# Altium PCB nrf52module.PcbDoc
Units mm, origin at the board's own origin, x right, y up, seen from the top; angles counter-clockwise.
Board outline 61 x 21 mm, 2 copper layers (Top Layer, Bottom Layer); 27 components, 54 nets, 114 pads, 16 vias.
Unrouted connection lines stored in the file: 43.
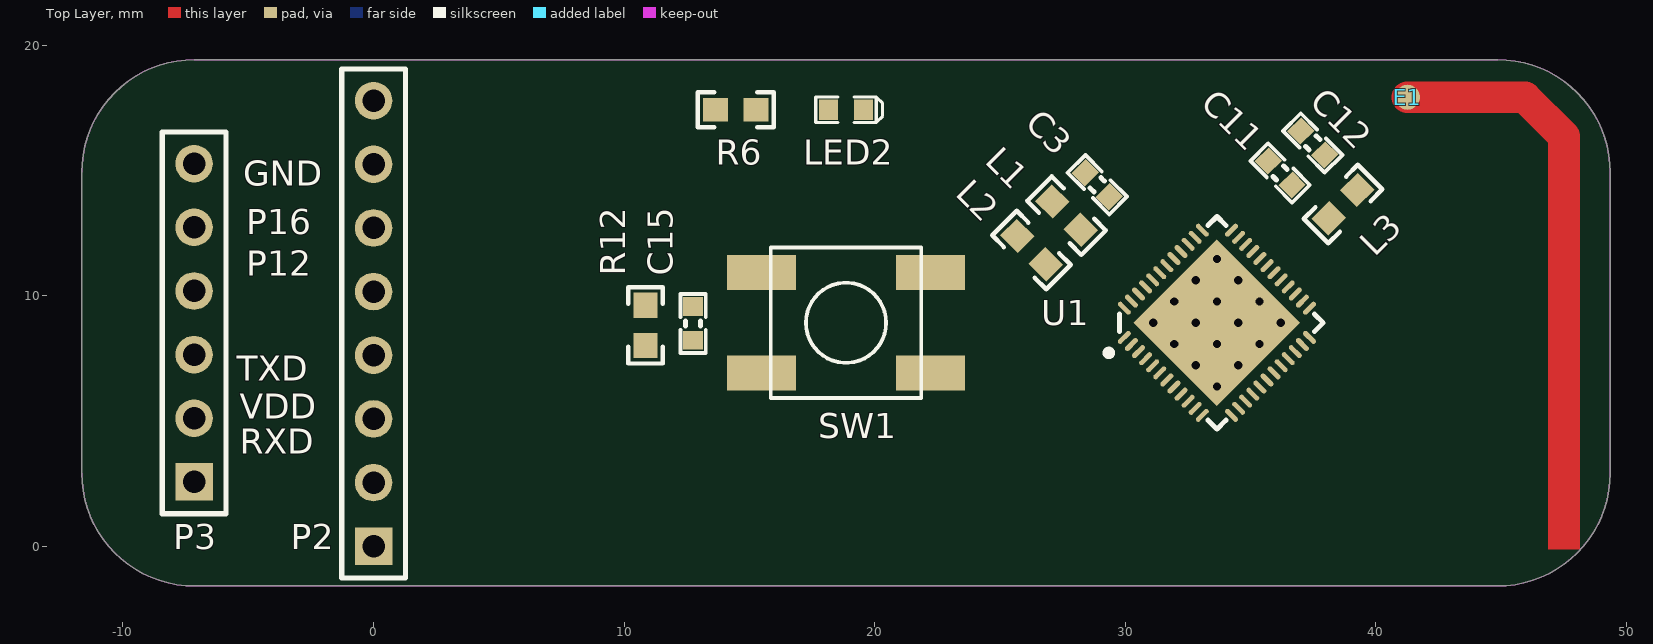
[diagram p0: Top Layer view]
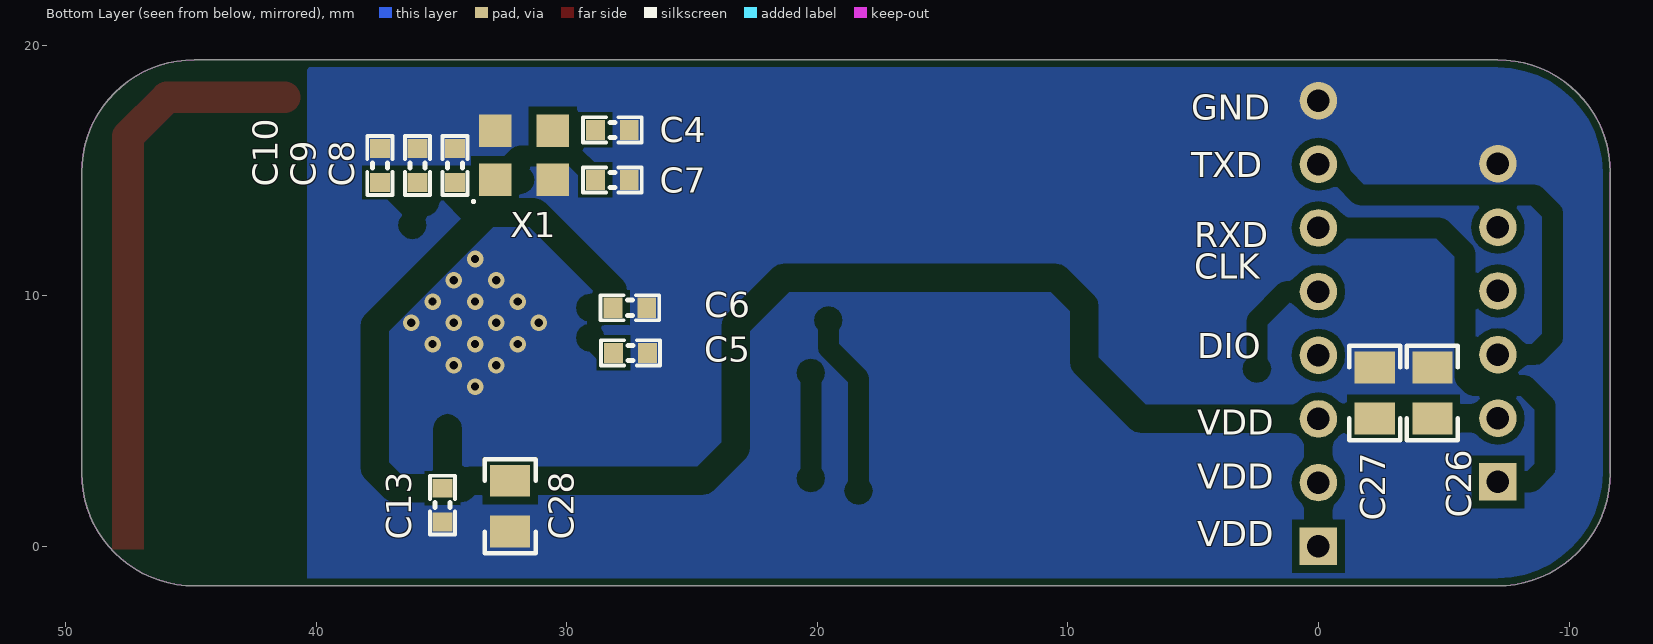
[diagram p1: Bottom Layer view, seen from below]

## Layer stack, top to bottom
Top Solder: solder mask 0.0102, Solder Resist, Dk 3.5
Top Layer: signal copper 0.0356
Dielectric 1: dielectric 0.32, FR-4, Dk 4.8
Bottom Layer: signal copper 0.0356
Bottom Solder: solder mask 0.0102, Solder Resist, Dk 3.5

## Board outline
-11.648,2.915 ccw(c-7.148,2.915) -7.148,-1.585 44.852,-1.585 ccw(c44.852,2.915) 49.352,2.915 49.352,14.915 ccw(c44.852,14.915) 44.852,19.415 -7.148,19.415 ccw(c-7.148,14.915) -11.648,14.915

## Design rules (kind name [scope] priority, off if disabled: settings)
Clearance [All] p1: gap=0.3
PolygonConnect [All] p1: connectstyle=Direct reliefconductorwidth=0.254 reliefentries=4 polygonreliefangle="90 Angle" airgapwidth=0.254
RoutingVias [All] p1: holewidth=0.711 width=1.27 viastyle="Through Hole" minholewidth=0.3 minwidth=0.3 maxholewidth=0.711 maxwidth=1.27
SolderMaskExpansion [All] p1: expansion=0.102
Width [All] p1: maxlimit=5 minlimit=0.2 preferedwidth=0.254
30 further rules are at their usual default settings.

## Classes and differential pairs
component class pca10040_sheet3_buttons_and_leds: C14 C15 C19 C20 C26 C27 C28 LED2 P3 R6 R9 R12 SB1 SW1 SW5

## Components (designator, comment, footprint, x,y, rotation, side; value= is the part's Value field where it differs from the comment)
C3 "1.0µF" CAPC1608X06L 28.88,14.427 r315 top
C4 "12pF" CAPC1608X06L 28.177,16.615 r180 bottom
C5 "100nF" CAPC1608X06L 27.452,7.715 r180 bottom
C6 "4.7µF" CAPC1608X06L 27.477,9.515 r180 bottom
C7 "12pF" CAPC1608X06L 28.177,14.615 r180 bottom
C8 "100nF" CAPC1608X06L 34.452,15.19 r90 bottom
C9 "100pF" CAPC1608X06L 35.952,15.19 r90 bottom
C10 "N.C." CAPC1608X06L 37.452,15.19 r90 bottom
C11 "0.8pF" CAPC1608X06L 36.175,14.893 r315 top
C12 "1.2pF" CAPC1608X06L 37.475,16.093 r135 top
C13 "100nF" CAPC1608X06L 34.952,1.64 r270 bottom
C15 "1.0µF" CAPC1608X06L 12.752,8.89 r90 top
C26 "105" 0805_HV -4.548,6.115 r270 bottom
C27 "105" 0805_HV -2.248,6.115 r270 bottom
C28 "105" 0805_HV 32.252,1.599 r90 bottom
E1 "Antenna" nrfant 41.252,17.915 r270 top locked
L1 "15nH" 0603 27.654,13.189 r135 top
L2 "10µH" 0603 26.252,11.815 r315 top
L3 "3.9nH" 0603 38.687,13.65 r45 top
LED2 "L0603G" LED_0603_G 18.852,17.415 r180 top locked
P2 "Header 8" HDR1X8 0,0 r90 top
P3 "Header 6" HDR1X6 -7.163,2.565 r90 top locked
R6 "220R" 0603 14.452,17.415 r180 top
R12 "100k" 0603 10.852,8.815 r90 top
SW1 "PB SW" Switch-PB-6.2x6.3mm-SMD 18.852,8.916 r0 top locked
U1 "nRF52832-QFAA" QFN40P600X600X90-48N 33.652,8.915 r45 top locked
X1 "CX3225SB32000D0FFFCC" SON230P260X60-4N 31.702,15.6 r90 bottom

## Footprints (in the part's own frame and the unit in brackets; to place one, negate y for a bottom-side part, rotate by r counter-clockwise, add the part's x,y. Pads: shape width x height; smd on the part's side, far side on the other; paste and mask are expansions set on the pad)
0603 [mm] "0603 from SM-752 data"
  rect 1x0.95 smd: 1(-0.8,0) 2(0.8,0)
  silkscreen extent -1.52,-0.69 1.52,0.69, body extent -0.87,-0.47 0.87,0.47, height 1
0805_HV [mil] "0805 with 30mil clearance between pads"
  rect 50x63 smd: 1(-40,0) 2(40,0)
  silkscreen extent -74,-40 74,40, body extent -43,-29 43,29, height 57
CAPC1608X06L [mm]
  rect 0.75x0.8 smd: 1(-0.675,0) 2(0.675,0)
  silkscreen extent -1.18,-0.5 1.18,0.5, body extent -0.8,-0.43 0.8,0.43, height 0.8
HDR1X6 [mm] "Connector; Header; 6 Position"
  rect 1.5x1.5 hole 0.9: 1(0,0)
  round 1.5 hole 0.9: 2(2.54,0) 3(5.08,0) 4(7.62,0) 5(10.16,0) 6(12.7,0)
  silkscreen extent -1.27,-1.27 13.97,1.27
HDR1X8 [mm] "Connector; Header; 8 Position"
  rect 1.5x1.5 hole 0.9: 1(0,0)
  round 1.5 hole 0.9: 2(2.54,0) 3(5.08,0) 4(7.62,0) 5(10.16,0) 6(12.7,0) 7(15.24,0) 8(17.78,0)
  silkscreen extent -1.27,-1.27 19.05,1.27
LED_0603_G [mil]
  rect 30x32 smd: 1(-27.5,0) 2(27.5,0)
  silkscreen extent -58,-20 48,20, body extent -32,-16 32,16, height 24
nrfant [mm]
  round 1 smd: 1(0,0)
  Top Layer region: 18.049,5.617 18.049,6.887 17.287,6.887 17.287,5.617
  Top Layer lines w1.27: 0,0 0,4.689 1.559,6.248 17.401,6.248
QFN40P600X600X90-48N [mm]
  oval 0.65x0.2 smd: 1(-3.025,2.2) 2(-3.025,1.8) 3(-3.025,1.4) 4(-3.025,1) 5(-3.025,0.6) 6(-3.025,0.2) 7(-3.025,-0.2) 8(-3.025,-0.6) 9(-3.025,-1) 10(-3.025,-1.4) 11(-3.025,-1.8) 12(-3.025,-2.2) 25(3.025,-2.2) 26(3.025,-1.8) 27(3.025,-1.4) 28(3.025,-1) 29(3.025,-0.6) 30(3.025,-0.2) 31(3.025,0.2) 32(3.025,0.6) 33(3.025,1) 34(3.025,1.4) 35(3.025,1.8) 36(3.025,2.2)
  oval 0.2x0.65 smd: 13(-2.2,-3.025) 14(-1.8,-3.025) 15(-1.4,-3.025) 16(-1,-3.025) 17(-0.6,-3.025) 18(-0.2,-3.025) 19(0.2,-3.025) 20(0.6,-3.025) 21(1,-3.025) 22(1.4,-3.025) 23(1.8,-3.025) 24(2.2,-3.025) 37(2.2,3.025) 38(1.8,3.025) 39(1.4,3.025) 40(1,3.025) 41(0.6,3.025) 42(0.2,3.025) 43(-0.2,3.025) 44(-0.6,3.025) 45(-1,3.025) 46(-1.4,3.025) 47(-1.8,3.025) 48(-2.2,3.025)
  rect 4.7x4.7 smd: 49(0,0)
  silkscreen extent -4.02,-3 3,3, body extent -3.02,-3.02 3.02,3.02, height 0.86
SON230P260X60-4N [mm] "SON, 4-Leads, Body 3.25x2.55mm, Pitch 2.30mm, IPC Medium Density"
  rect 1.3x1.3 smd: 1(-0.985,1.15) 2(-0.985,-1.15) 3(0.985,-1.15) 4(0.985,1.15)
  silkscreen extent -1.9,1.96 -1.8,2.06, body extent -1.3,-1.65 1.3,1.65, height 0.6
Switch-PB-6.2x6.3mm-SMD [mm]
  rect 2.75x1.4 smd: 1(-3.375,2) 1(3.375,2) 2(-3.375,-2) 2(3.375,-2)
  silkscreen extent -3,-3 3,3, body extent -4,-3 4,3.3, height 3.1

## Part data
C3: library part C0603-1µ0, "Capacitor, X7R, ±10%"
C4 C7: library part C0402-12p, "Capacitor, NP0, ±2%"
C5 C8 C13: library part C0402-100n, "Capacitor, X7R, ±10%"
C6: library part C0603-4µ7, "Capacitor, X5R, ±10%"
C9: library part C0402-100p, "Capacitor, NP0, ±5%"
C10: library part C0402-N.C., "Not mounted"
C11: library part C0402-0.8p, "Capacitor, NP0, ±5%"
C12: library part C0402-1.2p, "Capacitor, NP0, ±0.1pF"
C15: library part C0402-1µ0, "Capacitor, X5R, ±5%"
C26 C27 C28: library part CM, "Cap SMD"
E1: "Generic Antenna"
L1: library part L0402-15n, "Inductor, 320mA, ±5%"
L2: library part L0603-10µ, "Inductor, 80mA, ±10%"
L3: library part L0402-3n9, "Inductor, 170mA, ±0.1nH"
LED2: library part "LG L29K Smartled Green", "LED SMARTLED GREEN 570NM 0603"
P2: "Header, 8-Pin"
P3: "Header, 6-Pin"
R6: library part R0402-220, "Resistor, ±1%, 0.063W"
R12: library part R0402-100k, "Resistor, ±1%, 0.063W"
SW1: library part Switch-PB-6.2x6.3mm-SMD, "Tactile Switch, SPNO, SMD, 160gf, 6.2x6.3x2.5mm"
U1: "Multi-protocol Bluetooth Low Energy and 2.4GHz proprietary system-on-chip"
X1: library part XTAL_SMD2016_32MHz_8pF_Epson, "XTAL SMD 2016, 32MHz, Cl=8pF, Tol: ±10ppm, Stab: ±10ppm"

## Via types
v1: diameter 0.66, hole 0.33, Top Layer to Bottom Layer, tented both sides, 16 vias

## Nets (pads, with @x,y where several pads share a name; then routed paths per layer and width w, separated by ;. In a path a pad name is that pad's centre, name@x,y a point inside that pad or via, vN(x,y) a via of type N, cw(c..) or ccw(c..) an arc to the next point about the centre after c; other vN are vias at no path point)
ANT: C12.1 E1.1 L3.2
BOOT: 
BUTTON1: C15.1 R12.1 SW1.2 U1.17
CTS: 
DEC1: C5.1 U1.1
DEC2: C10.1 U1.32
DEC3: C9.1 U1.33
DEC4: C3.2 L1.1 U1.46
GND: C3.1 C4.2 C5.2 C6.2 C7.2 C8.2 C9.2 C10.2 C11.1 C12.2 C13.2 C15.2 C26.1 C27.1 C28.1 P2.8 P3.6 SW1.1 U1.31 U1.45 U1.49 X1.2 X1.4
  other v1: 33.652,6.37 32.804,7.218 34.501,7.218 31.955,8.067 33.652,8.067 35.349,8.067 31.107,8.915 32.804,8.915 34.501,8.915 36.198,8.915 31.955,9.764 33.652,9.764 35.349,9.764 32.804,10.612 34.501,10.612 33.652,11.461
LED2: LED2.1 U1.21
NetC11_2: C11.2 L3.1 U1.30
NetL1_2: L1.2 L2.1
NetL2_2: L2.2 U1.47
NetLED2_2: LED2.2 R6.1
NFC1: 
NFC2: 
P0.00: U1.2
P0.01: U1.3
P0.02: U1.4
P0.03: U1.5
P0.04: U1.6
P0.05: U1.7
P0.06: P2.6 P3.1 U1.8
P0.07: U1.9
P0.08: P2.7 P3.3 U1.10
P0.09: 
P0.09/NFC1: U1.11
P0.10: 
P0.10/NFC2: U1.12
P0.11: U1.14
P0.12: P3.4 U1.15
P0.13: U1.16
P0.15: U1.18
P0.16: P3.5 U1.19
P0.17: U1.20
P0.19: U1.22
P0.20: U1.23
P0.21: U1.24
P0.22: U1.27
P0.23: U1.28
P0.24: U1.29
P0.25: U1.37
P0.26: U1.38
P0.27: U1.39
P0.28: U1.40
P0.29: U1.41
P0.30: U1.42
P0.31: U1.43
RTS: 
SWDCLK: P2.5 U1.25
SWDIO: P2.4 U1.26
VDD_NRF: C6.1 C8.1 C13.1 C26.2 C27.2 C28.2 P2.1 P2.2 P2.3 P3.2 R6.2 R12.2 U1.13 U1.36 U1.48
XC1: C7.1 U1.34 X1.1
XC2: C4.1 U1.35 X1.3
pads on no net: U1.44

## Polygon pours and split planes (outlines as drawn)
GND on Bottom Layer "Bottom Layer-No Net" (solid, remove dead copper, pour order 3): 40.352,19.415 40.352,-1.585 -7.428,-1.585 -7.443,-1.57 -7.457,-1.556 -7.737,-1.556 -7.969,-1.556 -8.026,-1.498 -8.084,-1.441 -8.316,-1.441 -8.5,-1.441 -8.595,-1.346 -8.69,-1.251 -8.874,-1.251 -9.008,-1.251 -9.139,-1.121 -9.269,-0.99 -9.403,-0.99 -9.485,-0.99 -9.649,-0.826 -9.812,-0.662 -9.894,-0.662 -9.921,-0.662 -10.116,-0.468 -10.532,-0.052 -10.532,-0.024 -10.726,0.17 -10.89,0.334 -10.89,0.415 -10.89,0.497 -11.054,0.661 -11.184,0.791 -11.184,0.925 -11.184,1.059 -11.315,1.19 -11.41,1.284 -11.41,1.469 -11.41,1.653 -11.504,1.748 -11.562,1.806 -11.562,2.037 -11.562,2.269 -11.62,2.327 -11.548,2.399 -11.548,14.815 -11.548,15.779 -11.562,15.793 -11.41,15.946 -11.41,16.362 -11.41,16.546 -11.315,16.641 -11.054,16.902 -11.054,17.17 -11.054,17.309 -10.848,17.515 -10.532,17.831 -10.532,17.882 -10.116,18.299 -9.757,18.657 -9.649,18.657 -9.433,18.657 -9.139,18.951 -8.913,19.177 -8.595,19.177 -8.179,19.177 -8.026,19.329 -7.95,19.406 -7.443,19.406 40.343,19.406 40.352,19.415

## Keep-outs
Keep-Out Layer:
  the board outline again, w0.013

## Silkscreen, mask and mechanical layers (free items; w line width, h text height)
Top Overlay:
  text "GND" at -5.192,14.392 h1
  text "P16" at -5.08,12.446 h1
  text "P12" at -5.08,10.795 h1
  text "TXD" at -5.461,6.604 h1
  text "VDD" at -5.334,5.08 h1
  text "RXD" at -5.334,3.683 h1
Bottom Overlay:
  text "GND" at 5.08,17.018 h1
  text "TXD" at 5.08,14.732 h1
  text "RXD" at 4.953,11.938 h1
  text "CLK" at 4.953,10.668 h1
  text "DIO" at 4.826,7.493 h1
  text "VDD" at 4.826,4.445 h1
  text "VDD" at 4.826,2.286 h1
  text "VDD" at 4.826,0 h1
Mechanical 1:
  circle w0.013: c-3.648,8.916 r1.75
  circle w0.013: c41.352,8.916 r1.75
  circle w0.006: c18.852,8.916 r0.003
  circle w0.013: c-7.148,5.106 r0.455
  circle w0.013: c-7.148,2.566 r0.455
  circle w0.013: c-7.148,15.266 r0.455
  circle w0.013: c-7.148,12.726 r0.455
  circle w0.013: c-7.148,10.186 r0.455
  circle w0.013: c-7.148,7.646 r0.455
  circle w0.013: c-7.142,7.642 r0.455
  circle w0.013: c-7.142,10.182 r0.455
  circle w0.013: c-7.142,12.722 r0.455
  circle w0.013: c-7.142,15.262 r0.455
  circle w0.013: c-7.142,2.562 r0.455
  circle w0.013: c-7.142,5.102 r0.455
  circle w0.006: c7.608,18.412 r0.003
  circle w0.006: c18.858,8.912 r0.003
  circle w0.013: c41.358,8.912 r1.75
  circle w0.013: c-3.642,8.912 r1.75
  lines w0.013: 7.108,17.412 8.108,19.412 ; 7.108,17.412 7.108,19.412 ; 7.108,17.412 8.108,17.412 ; 7.108,19.412 8.108,17.412 ; 7.108,19.412 8.108,19.412 ; 8.108,17.412 8.108,19.412 ; -11.648,2.916 ccw(c-7.148,2.916) -7.148,-1.584 44.852,-1.584 ccw(c44.852,2.916) 49.352,2.916 49.352,14.916 ccw(c44.852,14.916) 44.852,19.416 -7.148,19.416 ccw(c-7.148,14.916) -11.648,14.916 -11.648,2.916 ; -11.642,2.912 ccw(c-7.142,2.912) -7.142,-1.588 44.858,-1.588 ccw(c44.858,2.912) 49.358,2.912 49.358,14.912 ccw(c44.858,14.912) 44.858,19.412 -7.142,19.412 ccw(c-7.142,14.912) -11.642,14.912 -11.642,2.912 ; -11.642,6.412 -11.642,7.412 -9.642,7.412 -9.642,6.412 -11.642,6.412 ; -8.372,1.292 -5.912,1.292 -5.912,16.532 -8.372,16.532 -8.372,1.292 ; 15.752,5.616 21.952,5.616 21.952,12.216 15.752,12.216 15.752,5.616 ; 15.758,5.612 15.758,12.212 21.958,12.212 21.958,5.612 15.758,5.612 ; 17.852,16.791 19.852,16.791 19.852,18.041 17.852,18.041 17.852,16.791 ; 17.858,16.787 17.858,18.037 19.858,18.037 19.858,16.787 17.858,16.787 ; 29.608,17.412 29.608,19.412 30.608,19.412 30.608,17.412 29.608,17.412 ; 47.358,6.412 49.358,6.412 49.358,7.412 47.358,7.412 47.358,6.412
  lines w0.05: -11.648,8.915 49.352,8.915 ; 17.852,17.415 19.852,17.415 ; 18.852,5.615 18.852,12.216 ; 18.852,16.791 18.852,18.041 ; 40.352,-1.585 40.352,19.415